# Altium PCB mainboard.PcbDoc
Units mm, origin at the board's own origin, x right, y up, seen from the top; angles counter-clockwise.
Board outline 25 x 20 mm, 2 copper layers (Top Layer, Bottom Layer); 22 components, 19 nets, 87 pads, 11 vias.
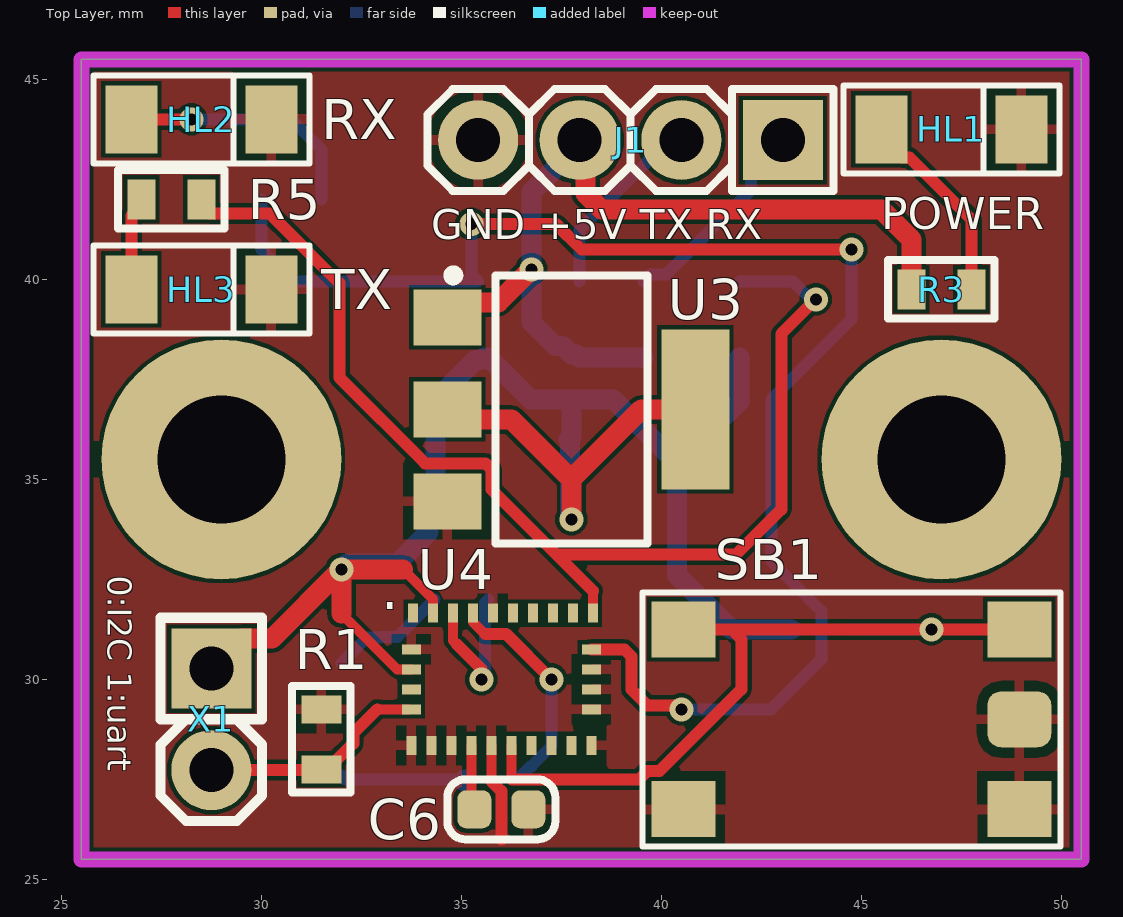
[diagram p0: Top Layer view]
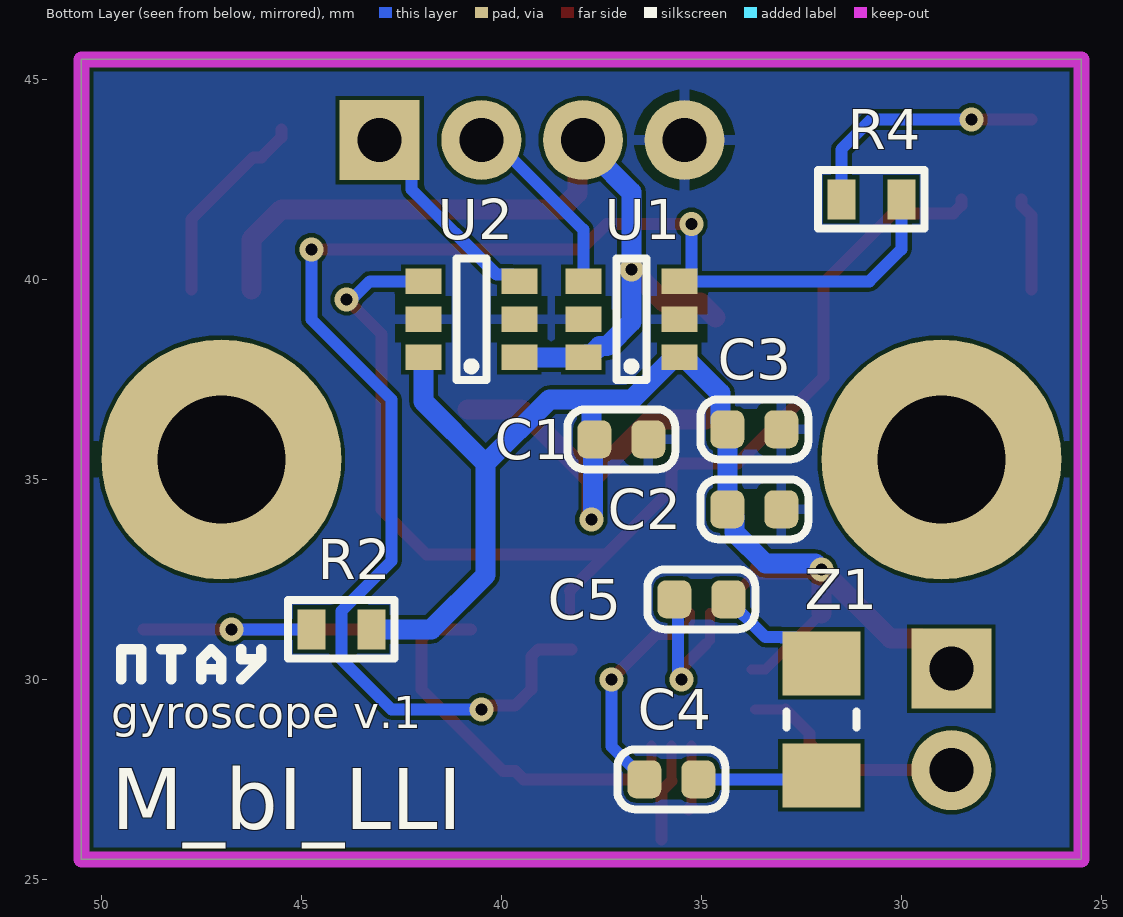
[diagram p1: Bottom Layer view, seen from below]
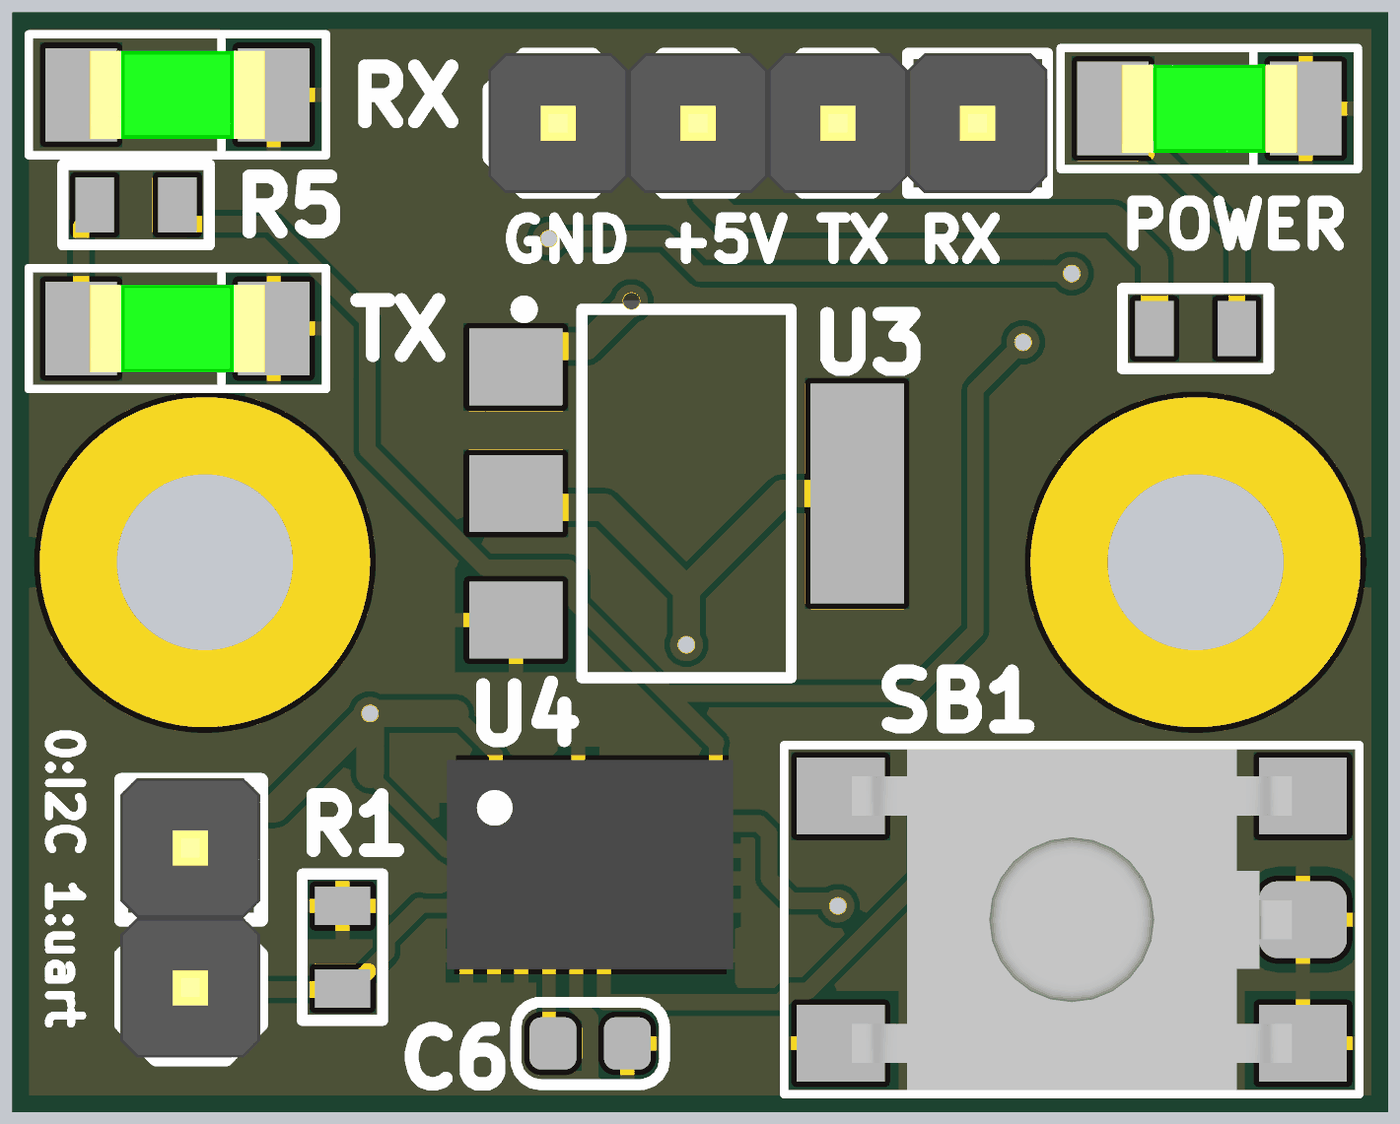
[diagram p2: 3D render of the assembled board from above, using the file's embedded part models]

## Layer stack, top to bottom
Top Solder: solder mask 0.0102, Solder Resist, Dk 3.5
Top Layer: signal copper 0.0356
Dielectric 1: dielectric 0.32, FR-4, Dk 4.8
Bottom Layer: signal copper 0.0356
Bottom Solder: solder mask 0.0102, Solder Resist, Dk 3.5

## Board outline
25.5,25.5 25.5,45.5 50.5,45.5 50.5,25.5

## Design rules (kind name [scope] priority, off if disabled: settings)
Clearance [All] p1: gap=0.1 ignorepadtopadclearanceinfootprint=FALSE except(0.2: Arc-Via Track-Via; 0.28: Arc-THPad Track-THPad)
PolygonConnect [All] p1: connectstyle=Relief reliefconductorwidth=0.254 reliefentries=4 polygonreliefangle="90 Angle" airgapwidth=0.254
RoutingVias [All] p1: holewidth=0.3 width=0.6 viastyle="Through Hole" minholewidth=0.3 minwidth=0.6 maxholewidth=0.5 maxwidth=0.6
SolderMaskExpansion [All] p1: expansion=0.102 istentingtop=FALSE
Width Width_Power [InNetClass('Power')] p1: maxlimit=0.5 minlimit=0.16 preferedwidth=0.5
Width [InNetClass('non-power_nets')] p2: maxlimit=0.3 minlimit=0.16 preferedwidth=0.3 minimp=50.000000 maximp=50.000000 favimp=50.000000
30 further rules are at their usual default settings.

## Classes and differential pairs
component class Scheme: C1 C3 C4 C5 C6 HL1 HL2 HL3 J1 R2 R4 R5 SB1 U1 U2 U3 U4 X1 Z1

## Components (designator, comment, footprint, x,y, rotation, side; value= is the part's Value field where it differs from the comment)
C1 "100нФ" C0603 37,36 r180 bottom
C2 "6.8нФ" C0603 33.675,34.25 r0 bottom
C3 "120нФ" C0603 33.675,36.25 r0 bottom
C4 "120пФ" C0603 35.75,27.5 r0 bottom
C5 "120пФ" C0603 35,32 r180 bottom
C6 "100нФ" C0603 36,26.75 r0 top
HL1 "" 1206_LED_GREEN 47.25,43.75 r180 top
HL2 "" 1206_LED_GREEN 28.5,44 r180 top
HL3 "" 1206_LED_GREEN 28.5,39.75 r180 top
J1 "PLS-4" PLS-4 39.23,43.483 r180 top
R1 "10k" R0603 31.5,28.5 r90 top
R2 "10k" R0603 44,31.25 r0 bottom
R3 "1k" R0603 47,39.75 r0 top
R4 "1k" R0603 30.75,42 r0 bottom
R5 "1k" R0603 27.75,42 r180 top
SB1 "" 1-1437565-6 44.75,29 r180 top
U1 "SN74LVC1T45DBVR" SOT23-6 36.75,39 r0 bottom
U2 "SN74LVC1T45DBVR" SOT23-6 40.75,39 r0 bottom
U3 "LM1117" SOT223_M 37.75,36.75 r0 top
U4 "BNO055" LGA60C50P10X6_520X380X118 36,30 r0 top
X1 "DS1021-1x2 (PLS-2)" PLS-2 28.75,29 r270 top
Z1 "SMD_quartz_resonator_32.768kHz 3.2*1.5mm" SMD_quartz_resonator_3.2*1.5 32,29 r270 bottom

## Footprints (in the part's own frame and the unit in brackets; to place one, negate y for a bottom-side part, rotate by r counter-clockwise, add the part's x,y. Pads: shape width x height; smd on the part's side, far side on the other; paste and mask are expansions set on the pad)
1-1437565-6 [mm] "Button"
  rect 1.6x1.4 smd mask+0.1: 1(-4.2,2.248) 1(4.2,2.248) 2(-4.2,-2.248) 2(4.2,-2.248)
  rrect50% 1.6x1.4 smd: 3(-4.2,0)
  silkscreen extent -5.23,-3.18 5.23,3.17, body extent -4,-3.1 4,3.1, height 3.1
1206_LED_GREEN [mm]
  rect 1.3x1.7 smd: 1(-1.75,0) 2(1.75,0)
  silkscreen extent -2.7,-1.1 2.7,1.1, body extent -1.6,-0.8 1.6,0.8, height 0.75
C0603 [mm] "Chip Capacitor, 2-Leads, Body 1,60x0,80mm, IPC Medium Density"
  rrect50% 0.85x0.95 smd: 1(-0.675,0) 2(0.675,0)
  Top Layer pour cut-out: -0.254,0.5 -0.254,-0.5 0.254,-0.5 0.254,0.5
  silkscreen extent -1.35,-0.75 1.35,0.75, body extent -0.85,-0.45 0.85,0.45, height 0.9
LGA60C50P10X6_520X380X118 [mm] "LGA, 60-Leads, Body 5,20x3,80mmx1,18mm, Pitch 0,50mm"
  rect 0.25x0.475 smd: 1(-2.214,1.652) 6(-2.25,-1.652) 7(-1.75,-1.652) 8(-1.25,-1.652) 9(-0.75,-1.652) 10(-0.25,-1.652) 11(0.25,-1.652) 12(0.75,-1.652) 13(1.25,-1.652) 14(1.75,-1.652) 15(2.25,-1.652) 20(2.286,1.652) 21(1.786,1.652) 22(1.286,1.652) 23(0.786,1.652) 24(0.286,1.652) 25(-0.214,1.652) 26(-0.714,1.652) 27(-1.214,1.652) 28(-1.714,1.652)
  rect 0.475x0.25 smd: 2(-2.25,0.75) 3(-2.25,0.25) 4(-2.25,-0.25) 5(-2.25,-0.75) 16(2.25,-0.75) 17(2.25,-0.25) 18(2.25,0.25) 19(2.25,0.75)
  body extent -2.6,-1.9 2.6,1.9, height 1.18
PLS-2 [mm]
  rect 2x2 hole 1.1: 1(-1.27,0)
  round 2 hole 1.1: 2(1.27,0)
  silkscreen extent -2.54,-1.27 2.54,1.27, body extent -2.57,-1.28 2.51,1.26, height 8.54
PLS-4 [mm]
  rect 2x2 hole 1.1: 1(-3.81,0)
  round 2 hole 1.1: 2(-1.27,0) 3(1.27,0) 4(3.81,0)
  silkscreen extent -5.08,-1.27 5.08,1.27, body extent -5.08,-1.27 5.08,1.27, height 8.54
R0603 [mm]
  rect 0.7x1 smd: 1(-0.75,0) 2(0.75,0)
  silkscreen extent -1.33,-0.73 1.33,0.73, body extent -0.8,-0.43 0.8,0.43, height 0.45
SMD_quartz_resonator_3.2*1.5 [mm]
  rect 1.6x1.95 smd: 1(-1.4,0) 2(1.4,0)
  silkscreen extent -0.2,-0.87 0.2,0.87, body extent -1.8,-0.95 1.8,0.95, height 0.75
SOT23-6 [mm]
  rect 0.9x0.64 smd: 1(-1.2,0.95) 2(-1.2,0) 3(-1.2,-0.95) 4(1.2,-0.95) 5(1.2,0) 6(1.2,0.95)
  silkscreen extent -0.38,-1.52 0.38,1.52, body extent -1.2,-1.4 1.23,1.4, height 1.09
SOT223_M [mm] "SOT223, 4-Leads, Body 6.5x3.5mm, Pitch 2.3mm, Lead Span 7mm, IPC Low Density"
  rect 1.7x1.4 smd: 1(-3.1,2.3) 2(-3.1,0) 3(-3.1,-2.3)
  rect 1.7x4 smd: 2(3.1,0)
  silkscreen extent -3.07,-3.35 1.9,3.47, body extent -1.85,-3.35 1.85,3.35, height 1.7

## Part data
C1 C2 C3 C4 C5 C6: library part C0603, "Конденсатор керамический 0603", Manufacturer=-, Name=-, TKE=-, Voltage=-
HL1 HL2 HL3: library part LED, "LED", Forward voltage; 25мА=2,15В, Manufacturer=KGB, Max. forward current (continuous)=25мА, Package=0603
R1 R2 R3 R4 R5: library part "Перемычка 0603", "Перемычка 0603", Name="Перемычка 0603"
SB1: library part Button, "Normally open button"
U1 U2: "1-битный шинный приемопередатчик с двуполярным питанием, тремя состояниями на выходе"
U4: "9-ти осевой гироскоп, акселлерометр и магнитометр"
X1: library part PLS-2, "Разъем - 2 конт. прямая вилка на плату, шаг 2,54 мм", Contact_1=Contact_1, Contact_2=Contact_2, Name="DS1021-1x2 (PLS-2)"
Z1: "резонатор кварцевый 32.768kHz"

## Free pads (board coordinates)
  round 6 hole 3.2: 0(29,35.5) 0(47,35.5)

## Via types
v1: diameter 0.6, hole 0.3, Top Layer to Bottom Layer, tented both sides, 11 vias

## Nets (pads, with @x,y where several pads share a name; then routed paths per layer and width w, separated by ;. In a path a pad name is that pad's centre, name@x,y a point inside that pad or via, vN(x,y) a via of type N, cw(c..) or ccw(c..) an arc to the next point about the centre after c; other vN are vias at no path point)
+3.3В: C1.1 C2.2 C3.2 R2.1 U1.1 U2.6 U3.2 U4.3 U4.28 X1.1 | length 45.3
  Top Layer w0.25: 32,31.643 33.393,30.25 U4.3 ; 33.545,32.75 34.286,32.009 U4.28
  Top Layer w0.5: X1.1 29.5,31.02 30.27,31.02 v1(32,32.75) ; 32,31.643 v1(32,32.75) ; 33.545,32.75 v1(32,32.75) ; U3.2@34.65,36.75 34.9,36.5 36.25,36.5 37.75,35 ; v1(37.75,34) 37.75,35 ; U3.2@40.85,36.75 39.5,36.75 37.75,35
  Bottom Layer w0.5: v1(32,32.75) 32.147,32.897 33.397,32.897 34.175,33.675 34.175,34.075 C2.2 ; C2.2@34.35,34.2 C3.2 34.525,36.425 34.525,37.155 35.35,37.98 35.48,37.98 U1.1 ; U1.1@35.68,38.05 36.73,37 37.75,37 ; C1.1 37.75,36.075 37.75,37 ; C1.1@37.713,35.962 37.713,34.038 v1(37.75,34) ; U2.6 41.95,36.95 40.395,35.395 ; R2.1 41.75,31.25 40.395,32.605 40.395,35.395 ; 37.75,37 38.79,37 40.395,35.395
+5В: J1.3 R3.1 U1.6 U2.1 U3.1 | length 22
  Top Layer w0.5: U3.1 35.025,39.425 35.925,39.425 v1(36.75,40.25) ; J1.3 38.101,43.341 38.101,42.149 38.5,41.75 45.5,41.75 46.25,41 R3.1
  Bottom Layer w0.5: J1.3@37.67,43.5 37.67,43.099 36.75,42.179 v1(36.75,40.25) 36.75,38.935 37.355,38.33 37.54,38.33 37.75,38.12 37.88,38.12 U1.6 38.15,38.05 U2.1
BOOT_LOAD_PIN: U4.4
GND: C1.2 C2.1 C3.1 C6.2 HL1.1 HL2.1 HL3.1 J1.4 R1.2 SB1.1 SB1.3 U1.2 U1.5 U2.2 U2.5 U3.3 U4.2 U4.6 U4.7 U4.8 U4.10 U4.15 U4.16 U4.17 U4.18 U4.25 | length 2.5
  Top Layer w0.25: 35.75,27.454 U4.10
  Top Layer w0.3: 35.75,27.454 36,27.204 36,26
INT: U4.14
NetC4_1: C4.1 Z1.2 | length 3.2
  Bottom Layer w0.3: Z1.2 32.1,27.5 35.025,27.5 C4.1@35.075,27.45
  Bottom Layer w0.5: C4.1@35.075,27.45 C4.1
NetC4_2: C4.2 U4.26 | length 5.6
  Top Layer w0.25: U4.26 35.286,31.436 35.587,31.135
  Top Layer w0.3: 35.587,31.135 36.117,31.135 37.25,30.002 v1(37.25,30)
  Bottom Layer w0.3: C4.2 36.425,27.516 36.734,27.825 36.75,27.825 37.25,28.325 v1(37.25,30)
NetC5_1: C5.1 U4.27 | length 4
  Top Layer w0.25: U4.27 34.786,30.976 34.89,30.872
  Top Layer w0.3: 34.89,30.872 35.5,30.262 v1(35.5,30)
  Bottom Layer w0.3: v1(35.5,30) 35.588,30.088 35.588,31.912 C5.1
NetC5_2: C5.2 Z1.1 | length 3
  Bottom Layer w0.3: Z1.1 32.65,31.05 32.996,31.05 33.001,31.055 33.396,31.055 33.953,31.612 34.325,31.984 C5.2
NetC6_1: C6.1 U4.9 | length 1.6
  Top Layer w0.25: C6.1@35.25,26.825 U4.9
  Top Layer w0.3: C6.1@35.25,26.825 C6.1
NetHL1_2: HL1.2 R3.2 | length 5
  Top Layer w0.3: HL1.2 45.5,43.55 46,43.05 46.2,43.05 47.75,41.5 R3.2
NetHL2_2: HL2.2 R4.2 | length 6.3
  Top Layer w0.3: HL2.2 v1(28.25,44)
  Bottom Layer w0.3: v1(28.25,44) 30.75,44 31.5,43.25 R4.2
NetHL3_2: HL3.2 R5.2 | length 2.4
  Top Layer w0.3: HL3.2 26.75,41.6 27,41.85 R5.2
RESET: R2.2 SB1.2 U4.11 | length 19.3
  Top Layer w0.25: U4.11 36.25,27.52 36.26,27.51
  Top Layer w0.3: 36.26,27.51 36.27,27.5 39.444,27.5 39.646,27.702 39.952,27.702 42,29.75 42,31 41.752,31.248 SB1.2@40.752,31.248 ; 41.752,31.25 v1(46.75,31.25) 48.947,31.25 SB1.2@48.95,31.248
  Bottom Layer w0.3: R2.2 v1(46.75,31.25)
RX: R4.1 U1.3 U4.19 | length 37.2
  Top Layer w0.3: v1(35.25,41.384) 37.366,41.384 38,40.75 v1(44.75,40.75) ; U4.19 39.074,30.75 39.25,30.574 39.25,29.75 39.658,29.342 40.408,29.342 v1(40.5,29.25)
  Bottom Layer w0.3: R4.1 30,40.75 30.8,39.95 35.42,39.95 35.25,40.12 v1(35.25,41.384) ; v1(40.5,29.25) 42.75,29.25 44,30.5 44,31.704 42.75,32.954 42.75,36.998 44.75,38.998 v1(44.75,40.75)
RX_INPUT: J1.1 U2.3 | length 5.2
  Bottom Layer w0.3: U2.3 39.72,40.12 40.12,40.12 42.243,42.243 42.243,42.686 J1.1
TX: R5.1 U2.4 U4.20 | length 30
  Top Layer w0.25: U4.20 38.286,32.212
  Top Layer w0.3: R5.1 28.5,41.85 28.7,41.65 30.204,41.65 31.95,39.904 31.95,37.546 34.096,35.4 35.604,35.4 35.75,35.254 35.75,34.748 37.383,33.115 ; 38.286,32.212 37.383,33.115 ; v1(43.865,39.5) 43,38.635 43,34.25 41.865,33.115 37.383,33.115
  Bottom Layer w0.3: U2.4 43.288,39.95 43.738,39.5 v1(43.865,39.5)
TX_INPUT: J1.2 U1.4 | length 4.5
  Bottom Layer w0.3: U1.4 37.95,41.24 J1.2@40.21,43.5
"UART / I2C": R1.1 U4.5 X1.2 | length 5.7
  Top Layer w0.25: 32.9,29.25 U4.5@33.663,29.25
  Top Layer w0.3: X1.2 31.48,27.73 R1.1 31.65,27.75 32.299,28.399 32.299,28.649 32.9,29.25
pads on no net: U4.1 U4.12 U4.13 U4.21 U4.22 U4.23 U4.24

## Polygon pours and split planes (outlines as drawn)
GND on Top Layer "GND_L01_P000" (solid, pour order 0): 25.75,45.25 50.25,45.25 50.25,25.75 25.75,25.75
GND on Bottom Layer "GND_L02_P001" (solid, pour order 1): 50.25,45.25 25.75,45.25 25.75,25.75 50.25,25.75

## Keep-outs
Keep-Out Layer:
  the board outline again, w0.4

## Silkscreen, mask and mechanical layers (free items; w line width, h text height)
Top Overlay:
  text "RX" at 31.504,43.504 h1
  text "POWER" at 45.504,41.254 h0.8
  text "GND +5V TX RX" at 34.254,41.004 h0.75
  text "TX" at 31.504,39.254 h1
  text "0:I2C 1:uart" at 26.16,32.59 h0.6 r270
  text "." at 33.004,31.754 h1
Bottom Overlay:
  lines w0.254: 46.5,30 46,30.5 ; 46.5,30.75 46.5,30.5 46,30.5 ; 47.5,30 47.5,30.5 47.25,30.75 ; 47.5,30.25 47,30.25 ; 48,30.75 48.5,30.75 48.25,30.75 48.25,30 ; 49,30 49,30.75 49.5,30.75 49.5,30 ; 46,30.5 46,30.75 46,30.5 ; 47,30.25 47,30.25 ; 47,30.25 47,30 47,30.5 47.25,30.75 ; 47.25,30.75 47.25,30.75
  text "gyroscope v.1" at 49.746,28.771 h0.8
  text "M_bI_LLI" at 49.746,26.258 h1.52